# EAGLE board adb (EAGLE 9.6.1)
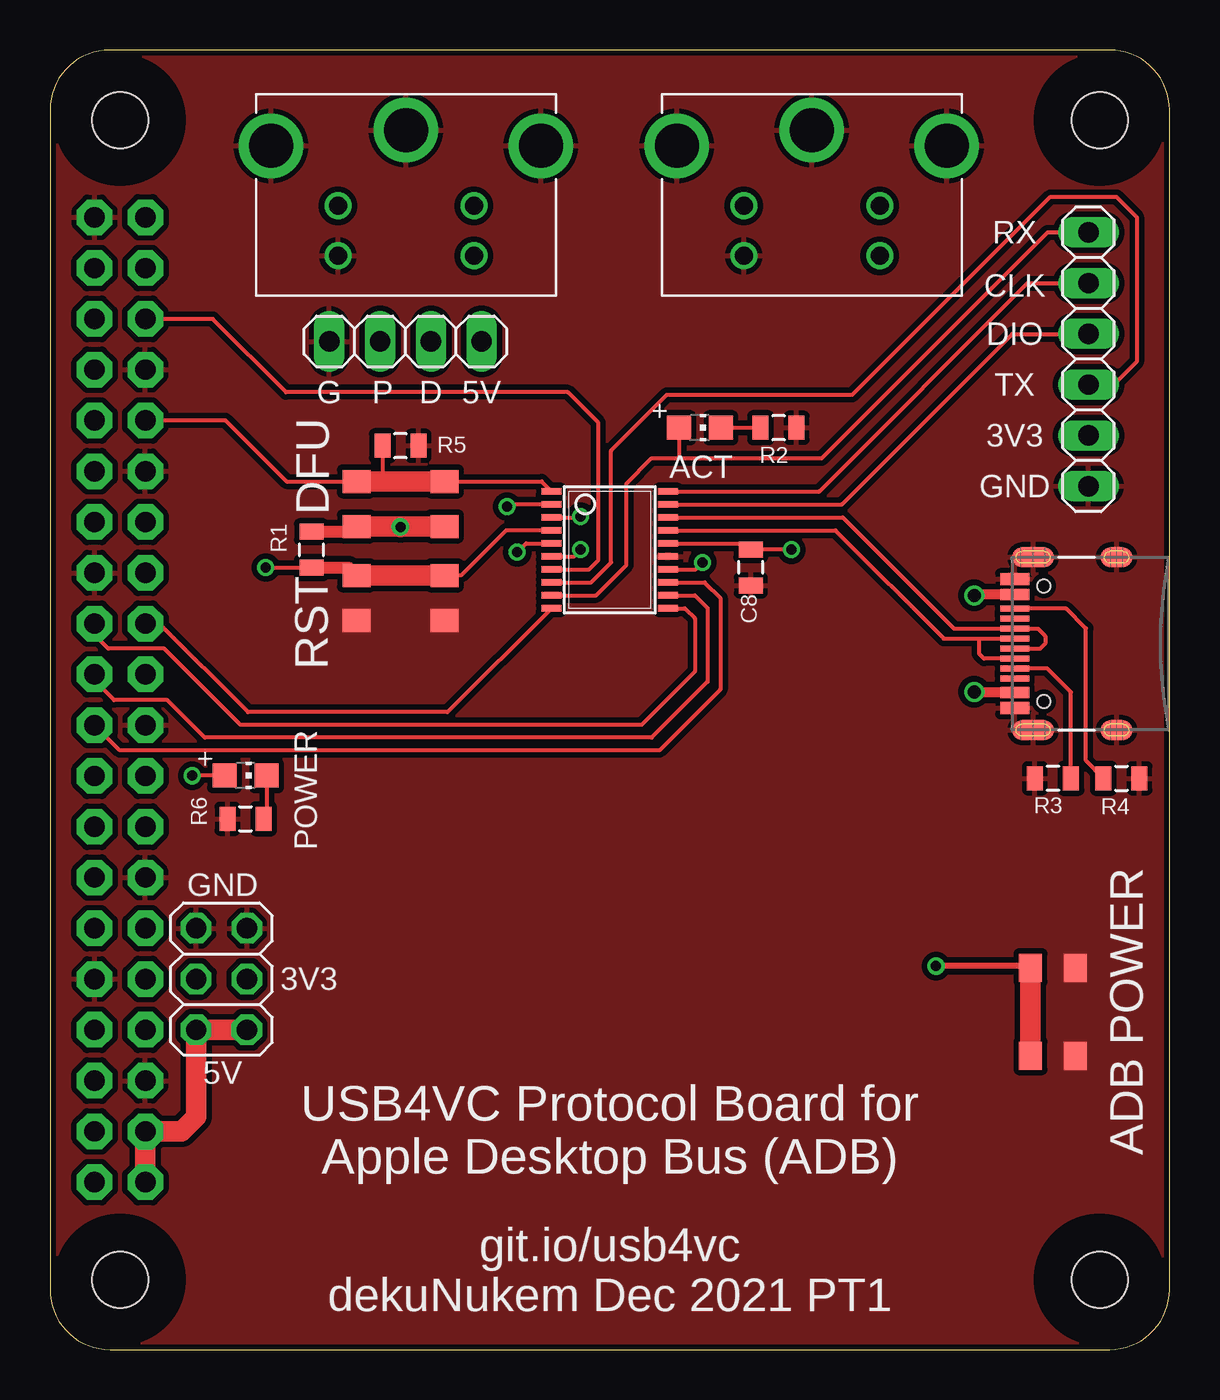
[diagram p0: board, top side]
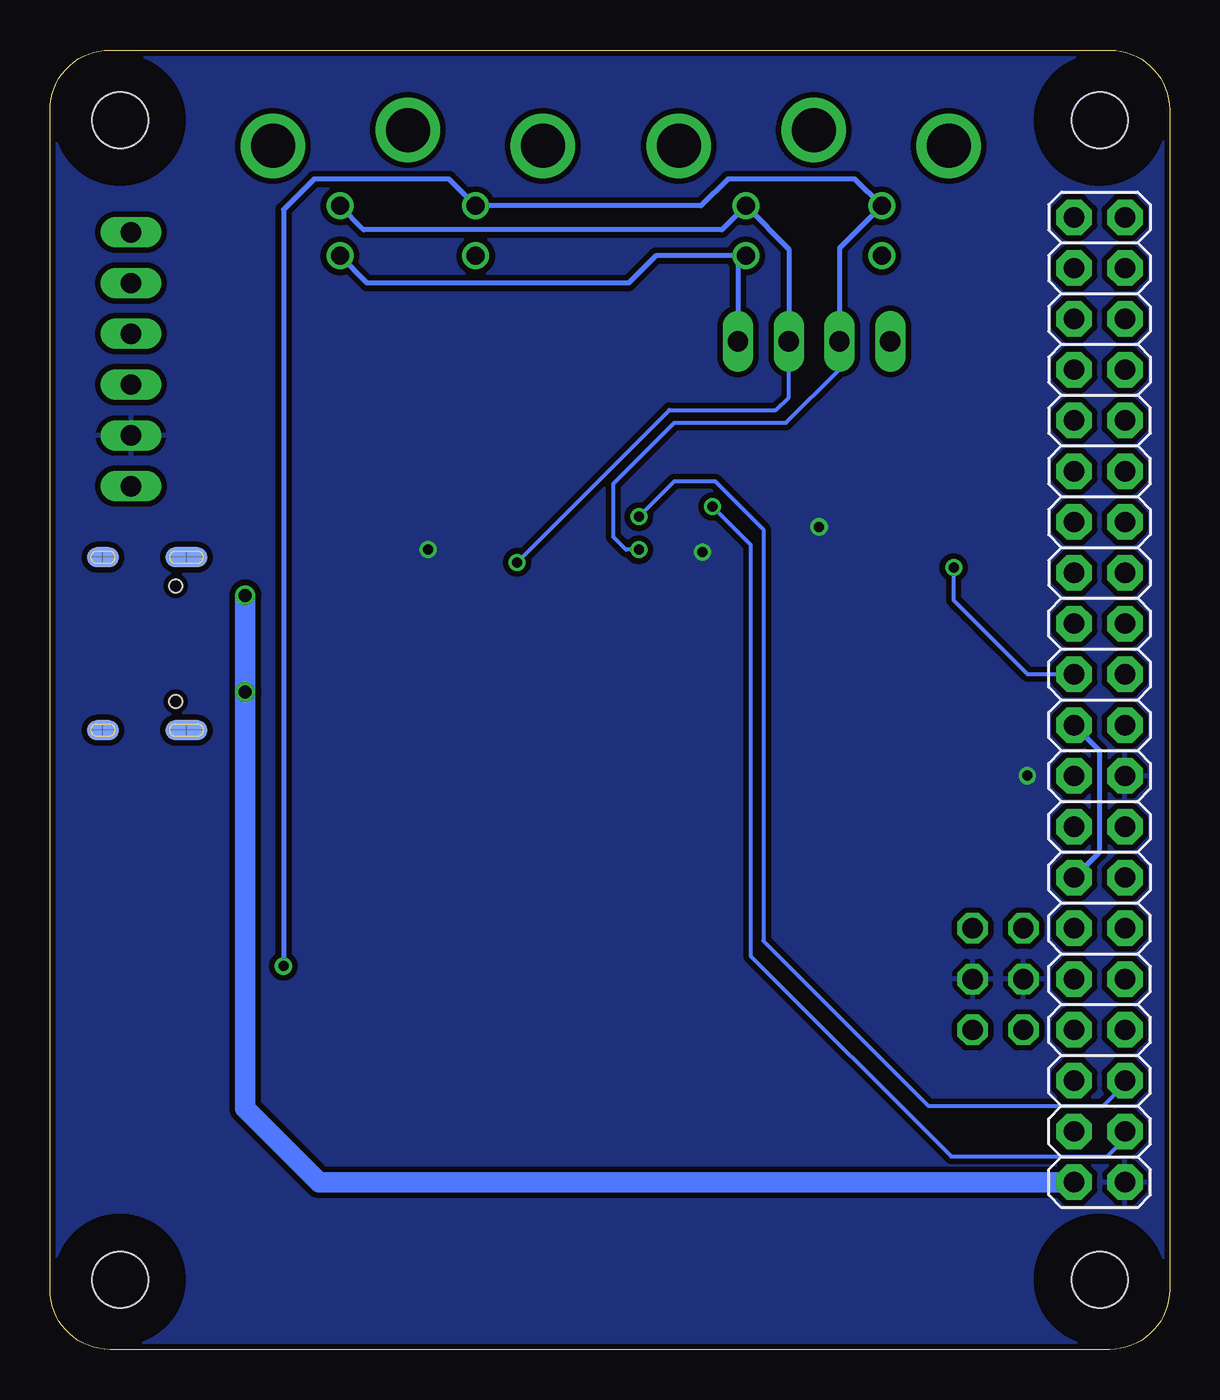
[diagram p1: board, bottom side, seen from below]

Size 56 x 65 mm. Coordinates in mm from the lower left corner, seen from the top.
Outline: 3,0 53,0 arc90 56,3 56,62 arc90 53,65 3,65 arc90 0,62 0,3 arc90 3,0
Copper layers (1*16): Top 0.035mm / dielectric 1.5mm / Bottom 0.035mm
Design rules "deku_2layer_6mil": minimum track width 6mil, minimum drill 15mil, track to track 6mil, track to pad 6mil, pad to pad 6mil, via to via 6mil, smd to smd 6mil, copper to edge 10mil, drill to drill 6mil, minimum pad ring 7mil, minimum via ring 7mil, stop-mask expansion 4mil, vias tented up to drill 25mil, thermal gap 10mil
Net classes: 1 power: width 0.178 mm

## Footprints (pad centres in the part's own frame; a part is rotated, then mirrored left to right if it is on the bottom)
0805@1 = smd 0.8 x 1.2: 1 -0.9,0; 2 0.9,0
TSSOP20 = smd 0.305 x 0.991: 1 -2.925,-2.918; 2 -2.275,-2.918; 3 -1.625,-2.918; 4 -0.975,-2.918; 5 -0.325,-2.918; 6 0.325,-2.918; 7 0.975,-2.918; 8 1.625,-2.918; 9 2.275,-2.918; 10 2.925,-2.918; 11 2.925,2.918; 12 2.275,2.918; 13 1.625,2.918; 14 0.975,2.918; 15 0.325,2.918; 16 -0.325,2.918; 17 -0.975,2.918; 18 -1.625,2.918; 19 -2.275,2.918; 20 -2.925,2.918
USB-C-16P = smd 0.3 x 1.45: A5 -1.25,0; A6 -0.25,0; A7 0.25,0; A8 1.25,0; B5 1.75,0; B6 0.75,0; B7 -0.75,0; B8 -1.75,0 | smd 0.6 x 1.45: GND -3.225,0; GND2 3.225,0 | smd 1 x 2.1: SHLD1 -4.32,-0.915; SHLD2 4.32,-0.915 | smd 1 x 2.1 bottom: SHLD3 -4.32,-0.915; SHLD4 4.32,-0.915 | smd 1 x 1.6: SHLD5 -4.32,-5.095; SHLD8 4.32,-5.095 | smd 1 x 1.6 bottom: SHLD6 -4.32,-5.095; SHLD7 4.32,-5.095 | smd 0.55 x 1.45: VBUS1 -2.45,0; VBUS2 2.45,0 | hole 0.65: -2.89,-1.445; 2.89,-1.445
2X20-BIG = drill 1.016 pad 1.778 octagon: 1 -24.13,-1.27; 2 -24.13,1.27; 3 -21.59,-1.27; 4 -21.59,1.27; 5 -19.05,-1.27; 6 -19.05,1.27; 7 -16.51,-1.27; 8 -16.51,1.27; 9 -13.97,-1.27; 10 -13.97,1.27; 11 -11.43,-1.27; 12 -11.43,1.27; 13 -8.89,-1.27; 14 -8.89,1.27; 15 -6.35,-1.27; 16 -6.35,1.27; 17 -3.81,-1.27; 18 -3.81,1.27; 19 -1.27,-1.27; 20 -1.27,1.27; 21 1.27,-1.27; 22 1.27,1.27; 23 3.81,-1.27; 24 3.81,1.27; 25 6.35,-1.27; 26 6.35,1.27; 27 8.89,-1.27; 28 8.89,1.27; 29 11.43,-1.27; 30 11.43,1.27; 31 13.97,-1.27; 32 13.97,1.27; 33 16.51,-1.27; 34 16.51,1.27; 35 19.05,-1.27; 36 19.05,1.27; 37 21.59,-1.27; 38 21.59,1.27; 39 24.13,-1.27; 40 24.13,1.27
1X06 = drill 1.016 long: 1 -6.35,0; 2 -3.81,0; 3 -1.27,0; 4 1.27,0; 5 3.81,0; 6 6.35,0
1X04 = drill 1.016 long: 1 -3.81,0; 2 -1.27,0; 3 1.27,0; 4 3.81,0
2X03 = drill 1.016 octagon: 1 -2.54,-1.27; 2 -2.54,1.27; 3 0,-1.27; 4 0,1.27; 5 2.54,-1.27; 6 2.54,1.27
CHIP-LED0805 = smd 1.2 x 1.2: A 0,-1.05; C 0,1.05
0805 = smd 0.8 x 1.2: 1 -0.9,0; 2 0.9,0
342_SWICH_FOOT = smd 1.4 x 1.15: P$1 -2.2,-1.125; P$2 -2.2,1.125; P$3 2.2,1.125; P$4 2.2,-1.125
DIN4 = drill 0.9: 1_ADB 3.4,-3.8; 2_PSW -3.4,-3.8; 3_5V 3.4,-6.3; 4_GND -3.4,-6.3 | drill 2.2: SHIELD1 -6.75,-0.8; SHIELD2 0,0; SHIELD3 6.75,-0.8
M2.5HOLE = hole 2.8: 0,0

## Placement (x,y rotation side)
C8  100nF  [0805@1]  35.05,39.12 90 top
IC3  STM32F042F4  [TSSOP20]  28,40 270 top
J4  [USB-C-16P]  48.26,35.31 90 top
JP1  [2X20-BIG]  3.5,32.5 90 bottom
JP2  [1X06]  51.94,49.53 270 top
JP3  [1X04]  17.78,50.42 180 top
JP4  [2X03]  8.58,18.53 90 top
LED1  [CHIP-LED0805]  32.51,46.1 270 top
LED2  [CHIP-LED0805]  9.78,28.7 270 top
R1  12K  [0805]  13.08,40.01 90 top
R2  2K  [0805]  36.45,46.1 180 top
R3  5.1k  [0805]  50.16,28.57 180 top
R4  5.1k  [0805]  53.59,28.57 0 top
R5  12K  [0805]  17.53,45.21 180 top
R6  2K  [0805]  9.78,26.54 0 top
SW1  324_SW  [342_SWICH_FOOT]  17.53,42.29 180 top
SW2  324_SW  [342_SWICH_FOOT]  50.16,16.89 90 top
SW4  324_SW  [342_SWICH_FOOT]  17.53,37.59 0 top
U$1  ADB  [DIN4]  17.8,61 0 top
U$2  M2.5HOLE  [M2.5HOLE]  3.5,3.5 0 top
U$3  M2.5HOLE  [M2.5HOLE]  52.5,3.5 0 top
U$4  M2.5HOLE  [M2.5HOLE]  3.5,61.5 0 top
U$5  M2.5HOLE  [M2.5HOLE]  52.5,61.5 0 top
U$6  ADB  [DIN4]  38.1,61 0 top

## Library data of the parts
C8 = clock
IC3 = tx
J4 = SparkFun-Connectors; PROD_ID: CONN-14122
JP1 = adafruit_changed
JP2-JP4 = pinhead
LED1 LED2 = adafruit
R1-R6 = SparkFun-Passives
SW1 SW2 SW4 = 3pos_slide_switch_centered
U$1 U$6 = adb
U$2-U$5 = f1c100s

## Nets
+3V3: C8.2 IC3.5 IC3.16 JP1.1 JP1.17 JP2.5 JP4.3 JP4.4 LED2.A R1.2 SW1.P$2 SW1.P$3
+5V: J4.VBUS1 J4.VBUS2 JP1.2 JP1.4 JP4.1 JP4.2
GND: C8.1 IC3.15 J4.GND J4.GND2 J4.SHLD1 J4.SHLD2 J4.SHLD3 J4.SHLD4 J4.SHLD5 J4.SHLD6 J4.SHLD7 J4.SHLD8 JP1.6 JP1.9 JP1.14 JP1.20 JP1.25 JP1.30 JP1.34 JP1.39 JP2.6 JP3.4 JP4.5 JP4.6 R2.1 R3.2 R4.2 R5.1 R6.1 SW2.P$1 SW2.P$4 SW4.P$1 SW4.P$4 U$1.4_GND U$1.SHIELD1 U$1.SHIELD2 U$1.SHIELD3 U$6.4_GND U$6.SHIELD1 U$6.SHIELD2 U$6.SHIELD3
N$1: J4.A5 R3.1
N$2: IC3.1 JP1.32 R5.2 SW1.P$1 SW1.P$4
N$3: IC3.18 J4.A6 J4.B6
N$4: IC3.17 J4.A7 J4.B7
N$5: IC3.8 JP2.4
N$6: IC3.19 JP2.3
N$7: J4.B5 R4.1
N$8: IC3.20 JP2.2
N$9: IC3.9 JP2.1 LED1.A
N$10: IC3.2 JP1.3
N$11: IC3.3 JP1.5
N$12: IC3.7 JP1.36
N$13: IC3.4 JP1.22 R1.1 SW4.P$2 SW4.P$3
N$14: JP3.1 U$1.3_5V U$6.3_5V
N$15: IC3.14 JP3.2 U$1.1_ADB U$6.1_ADB
N$17: LED1.C R2.2
N$18: IC3.6 JP3.3 SW2.P$2 SW2.P$3 U$1.2_PSW U$6.2_PSW
N$29: LED2.C R6.2
SPI_CS: IC3.10 JP1.24
SPI_MISO: IC3.12 JP1.21
SPI_MOSI: IC3.13 JP1.19
SPI_SCK: IC3.11 JP1.23

## Tracks (layer width: path | path; a pad name or v marks a point on that pad's centre or on a via)
+3V3  (via drill 0.5)
  Top 0.203: v23.37,39.88 23.82,40.33 IC3.5 | v37.08,40.01 35.06,40.01 C8.2 34.74,40.33 IC3.16 | LED2.A v7.11,28.7
  Top 0.61: R1.2 15.06,40.91 SW1.P$3
  Top 1.016: SW1.P$3 17.51,41.17 | 17.51,41.17 v17.53,41.15 | SW1.P$2 17.51,41.17
  pour Bottom (isolate 0.279, rank 2): 0,3 0,62 arc-90 3,65 53,65 arc-90 56,62 56,3 arc-90 53,0 3,0 arc-90
+5V  (via drill 0.65)
  Top 0.508: J4.VBUS2 46.27,37.76 v46.23,37.72 | J4.VBUS1 46.27,32.86 v46.23,32.89
  Top 1.016: JP1.2 JP1.4 6.59,10.91 7.31,11.63 JP4.2 JP4.1
  Bottom 1.016: v46.23,37.72 v46.23,32.89 46.23,12.06 42.53,8.37 JP1.2
GND
  Bottom 0.254: JP1.20 3.5,29.96 3.5,24.88 JP1.14
  pour Top (isolate 0.279): 3,0 53,0 arc90 56,3 56,62 arc90 53,65 3,65 arc90 0,62 0,3 arc90
N$1
  Top 0.203: R3.1 51.06,32.88 49.89,34.06 J4.A5
N$2
  Top 0.203: JP1.32 8.78,46.47 11.83,43.42 SW1.P$4 | R5.2 16.64,43.42 | SW1.P$1 24.59,43.42 IC3.1
  Top 1.016: SW1.P$4 16.64,43.42 SW1.P$1
N$3
  Top 0.203: IC3.18 39.66,41.62 45.22,36.06 J4.B6 49.41,36.06 49.78,35.69 49.78,35.31 49.53,35.05 49.53,35.06 J4.A6
N$4
  Top 0.203: IC3.17 39.29,40.98 44.71,35.56 46.48,35.56 | 46.48,35.56 J4.A7 | J4.B7 46.72,34.56 46.48,34.8 46.48,35.56
N$5
  Top 0.203: IC3.8 27.07,38.38 28.07,39.37 28.07,44.96 30.86,47.75 40.13,47.75 50.04,57.66 53.34,57.66 54.36,56.64 54.36,49.4 53.21,48.26 JP2.4
N$6
  Top 0.203: IC3.19 39.61,42.27 48.13,50.8 JP2.3
N$7
  Top 0.203: R4.1 51.82,29.45 51.82,36.07 50.83,37.06 J4.B5
N$8
  Top 0.203: IC3.20 38.48,42.92 48.9,53.34 JP2.2
N$9
  Top 0.203: IC3.9 27.31,37.73 28.83,39.24 28.83,43.31 30.1,44.58 31.5,44.58 | 31.5,44.58 38.61,44.58 49.91,55.88 JP2.1 | 31.5,44.58 31.5,46.07 LED1.A
N$10  (via drill 0.5)
  Top 0.203: IC3.2 22.97,42.27 v22.86,42.16
  Bottom 0.203: v22.86,42.16 20.95,40.26 20.95,19.68 10.92,9.65 3.11,9.65 2.23,10.53 JP1.3
N$11  (via drill 0.5)
  Top 0.203: IC3.3 26.51,41.62 v26.54,41.66
  Bottom 0.203: v26.54,41.66 24.77,43.43 22.73,43.43 20.32,41.02 20.32,20.45 12.06,12.19 3.3,12.19 2.23,13.26 JP1.5
N$12
  Top 0.203: IC3.7 26.96,39.02 27.43,39.5 27.43,46.35 25.91,47.88 11.81,47.88 8.14,51.55 JP1.36
N$13  (via drill 0.5)
  Top 0.203: IC3.4 22.81,40.98 20.56,38.72 19.94,38.72 SW4.P$3 | v10.79,39.12 R1.1
  Top 0.61: R1.1 14.94,39.1 SW4.P$2
  Top 1.016: SW4.P$2 19.94,38.72
  Bottom 0.203: JP1.22 7.1,33.77 10.79,37.47 v10.79,39.12
N$14
  Bottom 0.254: U$6.3_5V 40.14,53.34 27.05,53.34 25.69,54.7 U$1.3_5V 21.59,54.31 JP3.1
N$15  (via drill 0.5)
  Top 0.203: IC3.14 32.29,39.02 v32.64,39.37
  Bottom 0.203: v32.64,39.37 25.02,46.99 19.68,46.99 19.05,47.62 JP3.2
  Bottom 0.254: U$6.1_ADB 40.31,56.01 22.39,56.01 U$1.1_ADB 19.05,55.05 JP3.2
N$17
  Top 0.203: LED1.C R2.2
N$18  (via drill 0.5)
  Top 0.203: IC3.6 26.21,39.67 v26.54,40.01
  Top 0.305: SW2.P$3 48.95,19.18 v44.32,19.18
  Top 1.016: SW2.P$3 SW2.P$2
  Bottom 0.203: v26.54,40.01 27.18,40.01 27.81,40.64 27.81,43.31 24.77,46.35 19.18,46.35 16.51,49.02 JP3.3
  Bottom 0.254: JP3.3 16.51,55.09 U$1.2_PSW 15.75,58.55 22.1,58.55 23.45,57.2 U$6.2_PSW 36.05,58.55 42.8,58.55 44.32,57.02 v44.32,19.18
N$29
  Top 0.203: LED2.C 10.83,26.69 R6.2
SPI_CS
  Top 0.203: IC3.10 19.88,31.88 9.91,31.88 5.47,36.31 JP1.24
SPI_MISO
  Top 0.203: IC3.12 32.25,37.73 32.89,37.08 32.89,33.4 30.1,30.61 7.75,30.61 5.87,32.49 3.2,32.49 2.23,33.46 JP1.21
SPI_MOSI
  Top 0.203: IC3.13 32.74,38.38 33.53,37.59 33.53,33.02 30.48,29.97 3.49,29.97 JP1.19
SPI_SCK
  Top 0.203: IC3.11 31.76,37.08 32.26,36.58 32.26,33.91 29.59,31.24 9.53,31.24 5.71,35.05 2.92,35.05 2.23,35.74 JP1.23

## Text on the board
tNames: RX | CLK | DIO | G | P | D | 5V | TX | 3V3 | DFU | ACT | GND | RST | POWER | GND | 3V3 | ADB POWER | 5V | USB4VC Protocol Board for / Apple Desktop Bus (ADB) | git.io/usb4vc / dekuNukem Dec 2021 PT1